# Altium PCB PCB_tutorial.PcbDoc
Units mil, origin at the board's own origin, x right, y up, seen from the top; angles counter-clockwise.
Board outline 5115 x 1145 mil, 2 copper layers (Top Layer, Bottom Layer); 7 components, 4 nets, 15 pads, 4 vias.
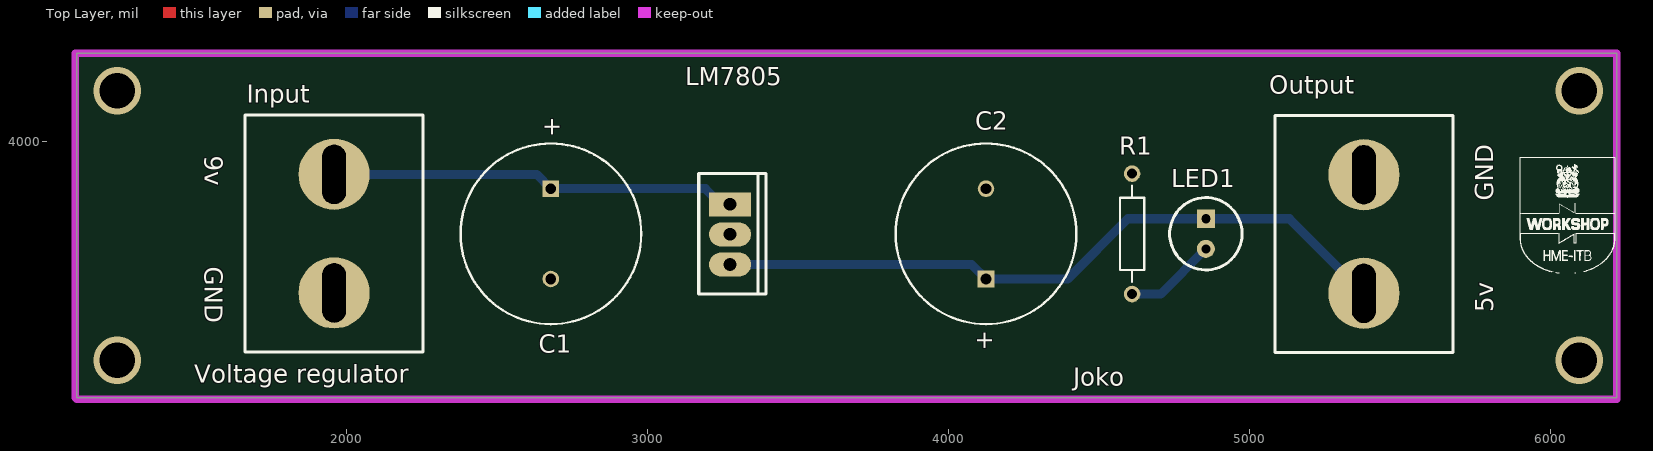
[diagram p0: Top Layer view]
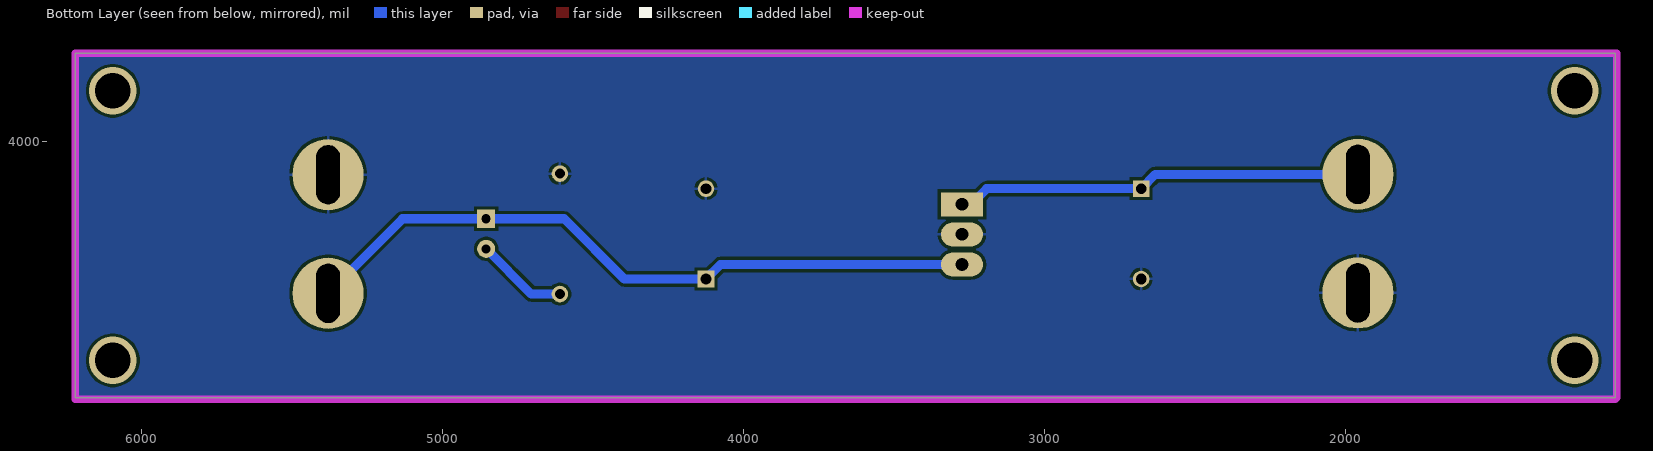
[diagram p1: Bottom Layer view, seen from below]

## Layer stack, top to bottom
Top Solder: solder mask 0.4, Solder Resist, Dk 3.5
Top Layer: signal copper 1.4
Dielectric 1: dielectric 12.6, FR-4, Dk 4.8
Bottom Layer: signal copper 1.4
Bottom Solder: solder mask 0.4, Solder Resist, Dk 3.5

## Board outline
1105,3150 6220,3150 6220,4295 1105,4295

## Design rules (kind name [scope] priority, off if disabled: settings)
Clearance [All] p1: gap=10 ignorepadtopadclearanceinfootprint=FALSE except(0: Arc-Hole Track-Hole SMDPad-Hole THPad-Hole Via-Hole Fill-Hole Poly-Hole Region-Hole Text-Hole)
ComponentClearance [All] p1 off: gap=10 collisioncheckmode=3 verticalgap=10 showdistances=FALSE
Height [All] p1 off: minheight=0 maxheight=1000 prefheight=500
PolygonConnect [All] p1: connectstyle=Relief reliefconductorwidth=10 reliefentries=4 polygonreliefangle="90 Angle" airgapwidth=10
RoutingVias [All] p1: holewidth=28 width=50 viastyle="Through Hole" minholewidth=28 minwidth=50 maxholewidth=28 maxwidth=50
SolderMaskExpansion [All] p1: expansion=4 istentingtop=FALSE
Width [All] p1: maxlimit=30 minlimit=15 preferedwidth=20 minimp=50.000000 maximp=50.000000 favimp=50.000000
28 further rules are at their usual default settings.

## Components (designator, comment, footprint, x,y, rotation, side; value= is the part's Value field where it differs from the comment)
C1 "Cap Polar 100uF" "Cap 100uF" 2680,3695 r90 top
C2 "Cap Polar 100uF" "Cap 100uF" 4125,3695 r270 top
Input "Terminal Barrier Besar 2 PIN" "Terminal Barrier Besar 2 PIN" 1960,3695.63 r0 top
LED1 "LED 5mm" "LED 5mm" 4855,3695.06 r270 top
LM7805 "78XX/79XX - with Heatsink" "78XX/79XX HEATSINK" 3276,3695 r0 top
Output "Terminal Barrier Besar 2 PIN" "Terminal Barrier Besar 2 PIN" 5380,3694.36 r180 top
R1 "Resistor 0.25W" "Resistor 0.25W" 4610,3695 r90 top

## Footprints (in the part's own frame and the unit in brackets; to place one, negate y for a bottom-side part, rotate by r counter-clockwise, add the part's x,y. Pads: shape width x height; smd on the part's side, far side on the other; paste and mask are expansions set on the pad)
"78XX/79XX HEATSINK" [mil]
  rect 140x80 hole 42: 1(-1,98)
  oval 140x80 hole 42: 2(-1,-2) 3(-1,-102)
  silkscreen extent -105,-200 119,200, body extent -160,-463 430,463, height 797
"Cap 100uF" [mm]
  rect 1.4x1.4 hole 0.9: 1(3.81,0)
  round 1.4 hole 0.9: 2(-3.81,0)
  silkscreen extent -7.62,-7.62 7.62,7.62, body extent -9,-9 9,9, height 25.98
"LED 5mm" [mil]
  rect 60x60 hole 30: 1(-50,0)
  round 60 hole 30: 2(50,0)
  silkscreen extent -120,-120 120,120, body extent -117,-118 96,118, height 268
"Resistor 0.25W" [mm]
  round 1.4 hole 0.85: 1(-5.08,0) 2(5.08,0)
  silkscreen extent -4.06,-1.02 4.06,1.02, body extent -5.35,-1.27 5.35,1.33, height 2.7
"Terminal Barrier Besar 2 PIN" [mm] "Tanpa Kuping"
  round 6 hole 2 slot 5 at 90 deg: 1(0,5) 2(0,-5)
  silkscreen extent -7.5,-10 7.5,10, body extent -18.3,-10.54 8.25,10.51, height 18.5

## Part data
C1 C2: library part "Cap 100uF"
Input Output: "Tanpa Kuping"
LM7805: library part 78XX/79XX-heatsink

## Via types
v1: diameter 157.48, hole 118.11, Top Layer to Bottom Layer, 4 vias

## Nets (pads, with @x,y where several pads share a name; then routed paths per layer and width w, separated by ;. In a path a pad name is that pad's centre, name@x,y a point inside that pad or via, vN(x,y) a via of type N, cw(c..) or ccw(c..) an arc to the next point about the centre after c; other vN are vias at no path point)
5v: C2.1 LED1.1 LM7805.3 Output.1 | length 2310.3
  Bottom Layer w30: LM7805.3 4077,3593 C2.1 4396.25,3545 4596.31,3745.06 LED1.1 5132.45,3745.06 Output.1
9v: C1.1 Input.1 LM7805.1 | length 1356.2
  Bottom Layer w30: Input.1 2632.52,3892.48 C1.1 3193,3845 3245,3793 LM7805.1
GND: C1.2 C2.2 Input.2 LM7805.2 Output.2 R1.2
NetLED1_2: LED1.2 R1.1 | length 307.2
  Bottom Layer w30: R1.1 4704.93,3495 LED1.2
copper on no net:
  other v1: 1240,3275 6095,3275 1240,4170 6095,4170

## Polygon pours and split planes (outlines as drawn)
GND on Bottom Layer "NONET_L-01_P-001" (solid, pour order 0): 1110,4295 6215,4295 6220,4290 6220,3150 1110,3150 1105,3155

## Keep-outs
Keep-Out Layer:
  lines w25: 1100,3150 1105,3145 6220,3145 6220,4295 1100,4295 1100,3150

## Silkscreen, mask and mechanical layers (free items; w line width, h text height)
Top Overlay:
  drawing of 29 lines, arcs and shapes, not listed
  text "9v" at 1530,3955 h60 r270
  text "GND" at 5810,3804.99 h60 r90
  text "GND" at 1530,3585 h60 r270
  text "5v" at 5810,3434.99 h60 r90
  text "Voltage regulator" at 1495,3199.99 h60
  text "Joko" at 4415,3190 h60

## Text inside footprints (layer, text, board x,y; h text height)
C1: Top Overlay "+" at 2709.01,4015.15 h59.06 r90
C2: Top Overlay "+" at 4095.99,3374.85 h59.06 r270